# Altium PCB Transmitter_PCB.PcbDoc
Units mil, origin at the board's own origin, x right, y up, seen from the top; angles counter-clockwise.
Board outline 6000 x 4000 mil, 2 copper layers (Top Layer, Bottom Layer); 11 components, 28 nets, 92 pads, 0 vias.
Unrouted connection lines stored in the file: 41.
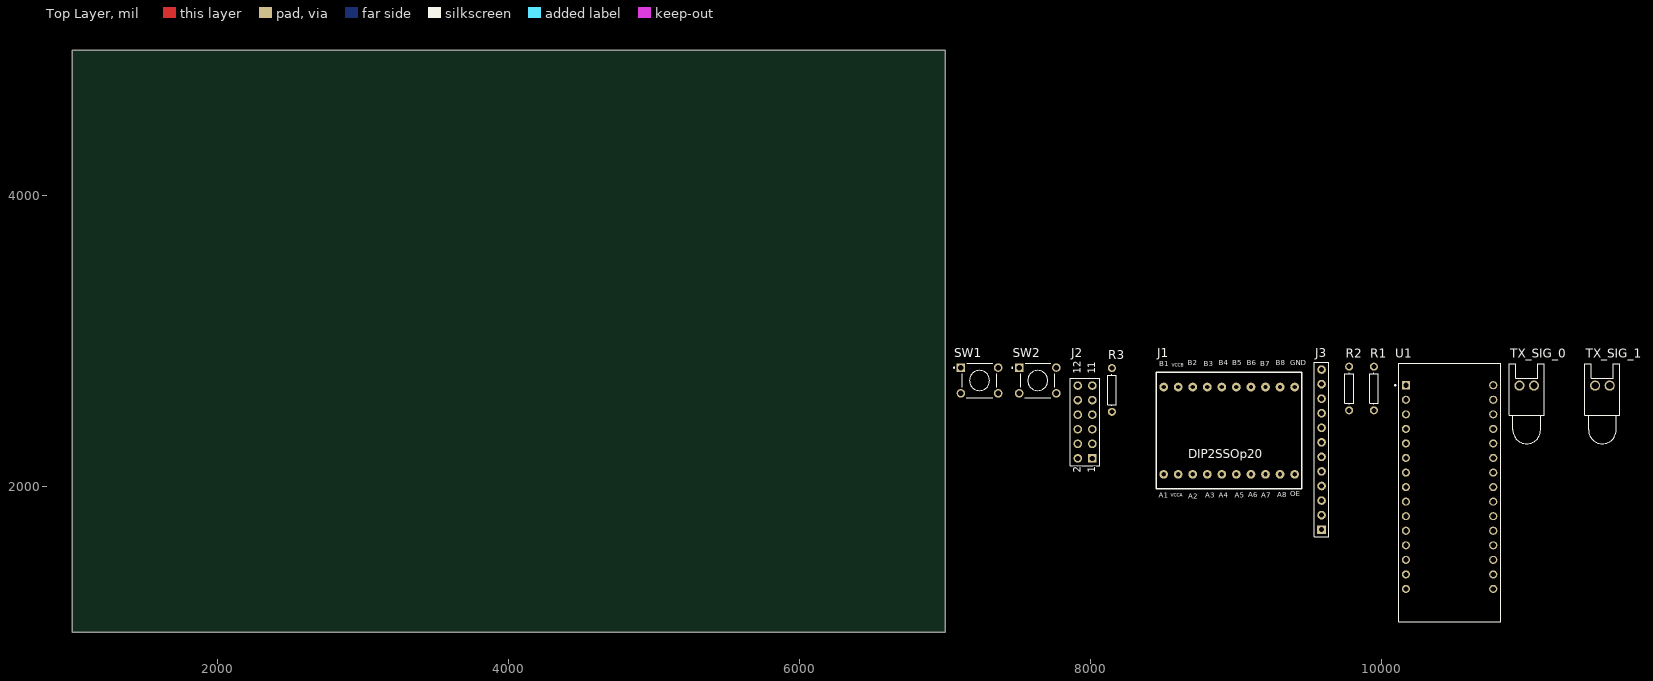
[diagram p0: Top Layer view]
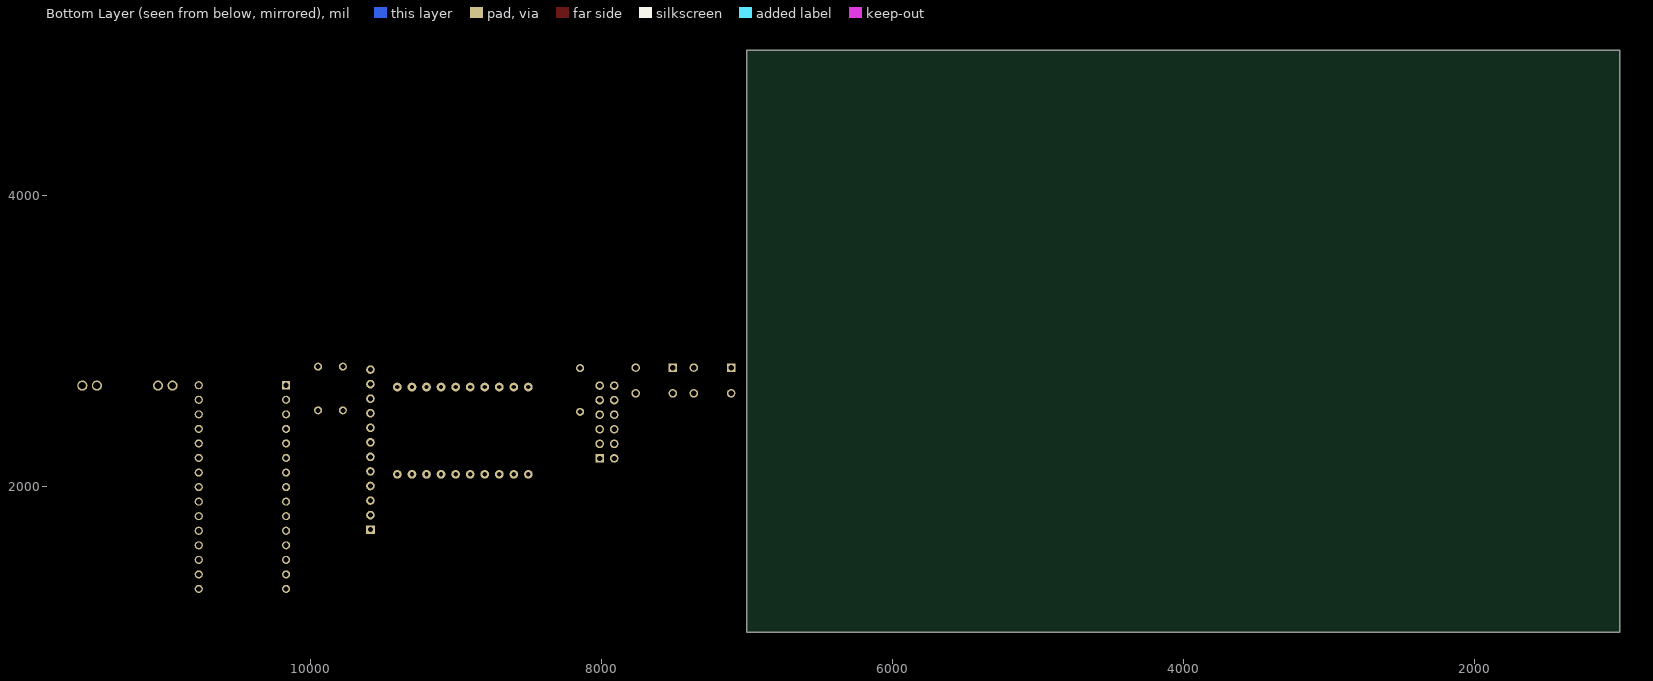
[diagram p1: Bottom Layer view, seen from below]

## Layer stack, top to bottom
Top Solder: solder mask 0.4, Solder Resist, Dk 3.5
Top Layer: signal copper 1.4
Dielectric 1: dielectric 12.6, FR-4, Dk 4.8
Bottom Layer: signal copper 1.4
Bottom Solder: solder mask 0.4, Solder Resist, Dk 3.5

## Board outline
1000,1000 7000,1000 7000,5000 1000,5000

## Design rules (kind name [scope] priority, off if disabled: settings)
Clearance [All] p1: gap=10 ignorepadtopadclearanceinfootprint=FALSE except(0: Arc-Hole Track-Hole SMDPad-Hole THPad-Hole Via-Hole Fill-Hole Poly-Hole Region-Hole Text-Hole)
PolygonConnect [All] p1: connectstyle=Relief reliefconductorwidth=10 reliefentries=4 polygonreliefangle="90 Angle" airgapwidth=10
RoomDefinition Transmitter [InComponentClass('Transmitter')] p1: confinementstyle=ConfineIn formatcopy=TRUE lockcomponents=FALSE outline 7045,1055 11870,1055 11870,2965 7045,2965
RoutingVias [All] p1: holewidth=28 width=50 viastyle="Through Hole" minholewidth=28 minwidth=50 maxholewidth=28 maxwidth=50
SolderMaskExpansion [All] p1: expansion=4 istentingtop=FALSE
Width [All] p1: maxlimit=10 minlimit=10 preferedwidth=10
30 further rules are at their usual default settings.

## Components (designator, comment, footprint, x,y, rotation, side; value= is the part's Value field where it differs from the comment)
J1 "Header 10X2" DIP2SSOP20 8500,2685 r0 top
J2 "Header 6X2" HDR2X6 8010,2195 r90 top
J3 "Header 12" HDR1X12 9585,1705 r90 top
R1 "Res1" AXIAL-0.3 9945,2675 r90 top value=220
R2 "Res1" AXIAL-0.3 9775,2675 r90 top value=220
R3 "Res1" AXIAL-0.3 8145,2665 r90 top value=470
SW1 "1825910-6" SW_1825910-6-4 7235,2730 r0 top
SW2 "1825910-6" SW_1825910-6-4 7635,2730 r0 top
TX_SIG_0 "Green_LED" LED-0 10995,2695 r0 top
TX_SIG_1 "Red_LED" LED-0 11515,2695 r0 top
U1 "A000005" FP-A000005-MFG 10465,1960 r0 top

## Footprints (in the part's own frame and the unit in brackets; to place one, negate y for a bottom-side part, rotate by r counter-clockwise, add the part's x,y. Pads: shape width x height; smd on the part's side, far side on the other; paste and mask are expansions set on the pad)
AXIAL-0.3 [mm] "Axial Device, Thru-Hole; 2 Leads; 0.3 in Pin Spacing"
  round 1.4 hole 0.85: 1(-3.81,0) 2(3.81,0)
  silkscreen extent -2.77,-0.76 2.77,0.76
DIP2SSOP20 [mil]
  round 60 hole 30: 1(0,-600) 2(100,-600) 3(200,-600) 4(300,-600) 5(400,-600) 6(500,-600) 7(600,-600) 8(700,-600) 9(800,-600) 10(900,-600) 11(900,0) 12(800,0) 13(700,0) 14(600,0) 15(500,0) 16(400,0) 17(300,0) 18(200,0) 19(100,0) 20(0,0)
  silkscreen extent -50,-700 950,100
FP-A000005-MFG [mil]
  rect 55.67x55.67 hole 35.98 paste-39370.1 mask+0: 1(-300,737.5)
  round 55.67 hole 35.98 paste-39370.1 mask+0: 2(-300,637.5) 3(-300,537.5) 4(-300,437.5) 5(-300,337.5) 6(-300,237.5) 7(-300,137.5) 8(-300,37.5) 9(-300,-62.5) 10(-300,-162.5) 11(-300,-262.5) 12(-300,-362.5) 13(-300,-462.5) 14(-300,-562.5) 15(-300,-662.5) 16(300,-662.5) 17(300,-562.5) 18(300,-462.5) 19(300,-362.5) 20(300,-262.5) 21(300,-162.5) 22(300,-62.5) 23(300,37.5) 24(300,137.5) 25(300,237.5) 26(300,337.5) 27(300,437.5) 28(300,537.5) 29(300,637.5) 30(300,737.5)
  silkscreen extent -379,-888 350,888, body extent -354,-891 354,891, height 10
HDR1X12 [mm] "Connector; Header; 12 Position"
  rect 1.5x1.5 hole 0.9: 1(0,0)
  round 1.5 hole 0.9: 2(2.54,0) 3(5.08,0) 4(7.62,0) 5(10.16,0) 6(12.7,0) 7(15.24,0) 8(17.78,0) 9(20.32,0) 10(22.86,0) 11(25.4,0) 12(27.94,0)
  silkscreen extent -1.27,-1.27 29.21,1.27
HDR2X6 [mm] "Connector; Header; 6x2 Position"
  rect 1.5x1.5 hole 0.9: 1(0,0)
  round 1.5 hole 0.9: 2(0,2.54) 3(2.54,0) 4(2.54,2.54) 5(5.08,0) 6(5.08,2.54) 7(7.62,0) 8(7.62,2.54) 9(10.16,0) 10(10.16,2.54) 11(12.7,0) 12(12.7,2.54)
  silkscreen extent -1.27,-1.27 13.97,3.81
LED-0 [mil] "LED; 2 Leads"
  round 70 hole 50: 1(50,0) 2(-50,0)
  silkscreen extent -120,-400 120,150
SW_1825910-6-4 [mm]
  rect 1.498x1.498 hole 0.99: 1(-3.25,2.25)
  round 1.498 hole 0.99: 2(3.25,2.25) 3(-3.25,-2.25) 4(3.25,-2.25)
  silkscreen extent -4.54,-3 3,3

## Part data
J1: "Header, 10-Pin, Dual row", LatestRevisionDate=17-Jul-2002, LatestRevisionNote="Re-released for DXP Platform.", Publisher="Altium Limited"
J2: "Header, 6-Pin, Dual row", LatestRevisionDate=17-Jul-2002, LatestRevisionNote="Re-released for DXP Platform.", Publisher="Altium Limited"
J3: "Header, 12-Pin", LatestRevisionDate=17-Jul-2002, LatestRevisionNote="Re-released for DXP Platform.", Publisher="Altium Limited"
R1 R2 R3: "Resistor", LatestRevisionDate=17-Jul-2002, LatestRevisionNote="Re-released for DXP Platform.", PackageDescription="Axial Device, Thru-Hole; 2 Leads; 0.3 in Pin Spacing", PackageReference=AXIAL-0.3, Published=8-Jun-2000, Publisher="Altium Limited"
SW1 SW2: "Switch Tactile OFF (ON) SPST Round Button PC Pins 0.05A 24VDC 100000Cycles 1.57N Thru-Hole Loose", Package=None, Availability=Unavailable, MP=1825910-6, Price=None
TX_SIG_0 TX_SIG_1: library part LED0, "Typical INFRARED GaAs LED", LatestRevisionDate=08-Jul-2005, LatestRevisionNote="Mech Layer 1 removed.", PackageDescription="LED; 2 Leads", PackageReference=LED-0, Published=8-Jun-2000, Publisher="Altium Limited"
U1: library part CMP-189986-000002-1, "ARDUINO NANO ATMEGA328 EVAL BRD", Operating Supply Voltage=12V, Package Quantity=50, Core Architecture=AVR, Data Bus Width=8b, Evaluation Kit=Yes, Height=0.25inch, Interface=I2C, Length=7inch, Number of Bits=8, Packaging=Bulk, REACH SVHC="No SVHC", Series="AVR® ATmega", Weight=0.358383oz, Width=5inch

## Nets (pads, with @x,y where several pads share a name; then routed paths per layer and width w, separated by ;. In a path a pad name is that pad's centre, name@x,y a point inside that pad or via, vN(x,y) a via of type N, cw(c..) or ccw(c..) an arc to the next point about the centre after c; other vN are vias at no path point)
DI03: J3.9
GND: J1.11 J2.2 J2.4 J2.6 J2.8 J2.10 J2.12 J3.1 J3.12 SW1.3 SW2.3 TX_SIG_0.2 TX_SIG_1.2 U1.4 U1.29
NetJ1_1: J1.1 J3.5
NetJ1_2: J1.2 J2.7 R3.2
NetJ1_3: J1.3 J3.7
NetJ1_4: J1.4 J3.6
NetJ1_5: J1.5 J3.4
NetJ1_6: J1.6 J3.2
NetJ1_7: J1.7 J3.10
NetJ1_8: J1.8 J3.11
NetJ1_9: J1.9 J3.3
NetJ1_10: J1.10 R3.1
NetJ1_12: J1.12 U1.9
NetJ1_13: J1.13 U1.10
NetJ1_14: J1.14 U1.11
NetJ1_15: J1.15 U1.12
NetJ1_16: J1.16 U1.13
NetJ1_17: J1.17 U1.14
NetJ1_18: J1.18 U1.15
NetJ1_19: J1.19 J2.1
NetJ1_20: J1.20 U1.16
NetJ2_9: J2.9 J3.8
NetR1_1: R1.1 TX_SIG_0.1
NetR1_2: R1.2 U1.5
NetR2_1: R2.1 TX_SIG_1.1
NetR2_2: R2.2 U1.6
NetSW1_2: SW1.2 U1.7
NetSW2_2: SW2.2 U1.8
pads on no net: J2.3 J2.5 J2.11 SW1.1 SW1.4 SW2.1 SW2.4 U1.1 U1.2 U1.3 U1.17 U1.18 U1.19 U1.20 U1.21 U1.22 U1.23 U1.24 U1.25 U1.26 U1.27 U1.28 U1.30

## Text inside footprints (layer, text, board x,y; h text height)
J1: Top Overlay "B1" at 8470,2815 h60; Top Overlay "A8" at 9280,1914.99 h60; Top Overlay "A7" at 9170,1910 h60; Top Overlay "A6" at 9080,1914.99 h60; Top Overlay "A5" at 8990,1909.99 h60; Top Overlay "A4" at 8880,1910 h60; Top Overlay "A3" at 8785,1909.99 h60; Top Overlay "A2" at 8670,1905 h60; Top Overlay "A1" at 8465,1910 h60; Top Overlay "B3" at 8775,2815.66 h60; Top Overlay "B4" at 8880,2820 h60; Top Overlay "B5" at 8970,2820.66 h60; Top Overlay "B6" at 9070,2820.66 h60; Top Overlay "B7" at 9165,2815 h60; Top Overlay "B8" at 9270,2820.66 h60; Top Overlay "B2" at 8665,2820 h60; Top Overlay "VCCA" at 8549.96,1919.99 h40; Top Overlay "OE" at 9370,1919.99 h60; Top Overlay "GND" at 9370,2820.66 h60; Top Overlay "VCCB" at 8555,2815.44 h40; Top Overlay "DIP2SSOp20" at 8670,2194.99 h60
J2: Top Overlay "2" at 7930,2095 h50 r90; Top Overlay "1" at 8030,2095 h50 r90; Top Overlay "1" at 8030,2775 h50 r90; Top Overlay "1" at 8030,2815 h50 r90; Top Overlay "12" at 7930,2775 h50 r90